# EAGLE board Rev1 (EAGLE 7.2.0)

Size 100 x 80 mm. Coordinates in mm from the lower left corner, seen from the top.
Outline: 0,0 100,0 100,80 0,80 0,0
Copper layers (1*16): Top 0.035mm / dielectric 1.5mm / Bottom 0.035mm
Design rules "default": minimum track width 10mil, minimum drill 24mil, track to track 8mil, track to pad 8mil, pad to pad 8mil, via to via 8mil, smd to smd 8mil, copper to edge 40mil, drill to drill 8mil, minimum pad ring 10mil, minimum via ring 8mil, stop-mask expansion 4mil, vias tented up to drill 0mil, thermal gap 10mil

## Footprints (pad centres in the part's own frame; a part is rotated, then mirrored left to right if it is on the bottom)
DIL16 = drill 0.813 long: 1 -8.89,-3.81; 2 -6.35,-3.81; 3 -3.81,-3.81; 4 -1.27,-3.81; 5 1.27,-3.81; 6 3.81,-3.81; 7 6.35,-3.81; 8 8.89,-3.81; 9 8.89,3.81; 10 6.35,3.81; 11 3.81,3.81; 12 1.27,3.81; 13 -1.27,3.81; 14 -3.81,3.81; 15 -6.35,3.81; 16 -8.89,3.81
1X07 = drill 1.016 pad 1.88: 1 0,0; 2 2.54,0; 3 5.08,0; 4 7.62,0; 5 10.16,0; 6 12.7,0; 7 15.24,0

## Placement (x,y rotation side)
IC1  74LS595N  [DIL16]  85.09,10.16 0 top
IC3  74LS595N  [DIL16]  45.72,57.15 0 top
IC4  74LS595N  [DIL16]  22.86,64.77 0 top
IC5  74LS595N  [DIL16]  62.23,45.72 0 top
IC6  74LS595N  [DIL16]  46.99,69.85 0 top
IC7  74LS595N  [DIL16]  22.86,8.89 0 top
IC8  74LS595N  [DIL16]  11.43,24.13 0 top
IC9  74LS595N  [DIL16]  80.01,27.94 0 top
IC10  74LS595N  [DIL16]  60.96,13.97 0 top
IC11  74LS595N  [DIL16]  80.01,64.77 0 top
IC12  74LS595N  [DIL16]  22.86,43.18 0 top
JP1  [1X07]  2.54,77.47 0 top

## Library data of the parts
IC1 IC3-IC12 = SparkFun-DigitalIC
JP1 = SparkFun-Connectors

## Nets
GND: IC1.8 IC3.8 IC4.8 IC5.8 IC8.8 IC11.8 IC12.8
GROUND: IC1.13 IC3.13 IC4.13 IC5.13 IC6.8 IC6.13 IC7.8 IC7.13 IC8.13 IC9.8 IC9.13 IC10.8 IC10.13 IC11.13 IC12.13 JP1.6
LATCH: IC1.12 IC4.12 IC6.12 IC7.12 IC8.12 IC9.12 IC10.12 IC11.12 IC12.12 JP1.5
N$1: IC12.14 JP1.4
N$2: IC11.14 IC12.9
N$3: IC10.14
N$4: IC5.14 IC10.9
N$5: IC1.14 IC5.9
N$6: IC3.14
N$8: IC4.9 IC6.14
N$9: IC7.14
N$10: IC8.14
N$11: IC8.9 IC9.14
N$12: IC4.11 IC7.11 IC11.11 JP1.3
VCC: IC1.16 IC3.16 IC4.10 IC4.16 IC5.10 IC5.16 IC6.16 IC7.10 IC7.16 IC8.10 IC8.16 IC9.16 IC10.16 IC11.10 IC11.16 IC12.16 JP1.7

## Tracks (layer width: path | path; a pad name or v marks a point on that pad's centre or on a via)
GND  (6 unrouted)
GROUND  (15 unrouted)
LATCH  (9 unrouted)
N$1  (1 unrouted)
N$2  (1 unrouted)
N$4  (1 unrouted)
N$5  (1 unrouted)
N$8  (1 unrouted)
N$11  (1 unrouted)
N$12  (3 unrouted)
VCC  (16 unrouted)